# EAGLE board EX Analog (EAGLE 7.2.0)

Size 27 x 58 mm. Coordinates in mm from the lower left corner, seen from the top.
Outline: 0,0 27,0 27,58 0,58 0,0
Copper layers (1*16): Top 0.035mm / dielectric 1.5mm / Bottom 0.035mm
Design rules "default": minimum track width 10mil, minimum drill 24mil, track to track 8mil, track to pad 8mil, pad to pad 8mil, via to via 8mil, smd to smd 8mil, copper to edge 40mil, drill to drill 8mil, minimum pad ring 10mil, minimum via ring 8mil, stop-mask expansion 4mil, vias tented up to drill 0mil, thermal gap 10mil

## Footprints (pad centres in the part's own frame; a part is rotated, then mirrored left to right if it is on the bottom)
1X10-BIG = drill 1.016 pad 1.778 octagon: 1 -11.43,0; 2 -8.89,0; 3 -6.35,0; 4 -3.81,0; 5 -1.27,0; 6 1.27,0; 7 3.81,0; 8 6.35,0; 9 8.89,0; 10 11.43,0
CHIPLED_0805 = smd 1.2 x 1.2: A 0,-1.05; C 0,1.05
1X02 = drill 1.016 long: 1 -1.27,0; 2 1.27,0
R0805 = smd 1.1 x 1.4: 1 -1,0; 2 1,0
SO16 = smd 0.6 x 2.2: 1 -4.445,-2.6; 2 -3.175,-2.6; 3 -1.905,-2.6; 4 -0.635,-2.6; 5 0.635,-2.6; 6 1.905,-2.6; 7 3.175,-2.6; 8 4.445,-2.6; 9 4.445,2.6; 10 3.175,2.6; 11 1.905,2.6; 12 0.635,2.6; 13 -0.635,2.6; 14 -1.905,2.6; 15 -3.175,2.6; 16 -4.445,2.6
1X03 = drill 1.016: 1 -2.54,0; 2 0,0; 3 2.54,0

## Placement (x,y rotation side)
ANALOG_IN  PINHD-1X10  [1X10-BIG]  13.5,47 180 top
LEDPWR  [CHIPLED_0805]  2,9 0 top
NUSBIO_IN  PINHD-1X10  [1X10-BIG]  13.5,2 180 top
NUSBIO_OUT  PINHD-1X10  [1X10-BIG]  13.5,56.5 180 top
PULLDOWN_1K_A6  [1X02]  25.02,40.1 90 top
PULLDOWN_1K_A7  [1X02]  8,39 90 top
R_PULLDOWN_1K_1  [R0805]  23.5,33 0 top
R_PULLDOWN_1K_2  [R0805]  23.5,29 0 top
R_PWR_1K  [R0805]  25,9 90 top
U$1  MCP3008SL  [SO16]  6.5,31 180 top
VCC_A0_GND  [1X03]  24,20 270 top
VCC_A1_GND  [1X03]  6,20 270 top

## Library data of the parts
ANALOG_IN LEDPWR NUSBIO_IN NUSBIO_OUT R_PULLDOWN_1K_1 R_PULLDOWN_1K_2 R_PWR_1K VCC_A0_GND VCC_A1_GND = adafruit
PULLDOWN_1K_A6 PULLDOWN_1K_A7 = pinhead
U$1 = MCP3008

## Nets
GND: ANALOG_IN.10 NUSBIO_IN.10 NUSBIO_OUT.10 R_PULLDOWN_1K_1.2 R_PULLDOWN_1K_2.2 R_PWR_1K.1 U$1.9 U$1.14 VCC_A0_GND.3 VCC_A1_GND.3
N$1: NUSBIO_IN.1 NUSBIO_OUT.1 U$1.13
N$2: NUSBIO_IN.2 NUSBIO_OUT.2 U$1.11
N$3: NUSBIO_IN.3 NUSBIO_OUT.3 U$1.12
N$4: NUSBIO_IN.5 NUSBIO_OUT.5
N$5: NUSBIO_IN.4 NUSBIO_OUT.4 U$1.10
N$6: LEDPWR.C R_PWR_1K.2
N$7: NUSBIO_IN.6 NUSBIO_OUT.6
N$8: NUSBIO_IN.7 NUSBIO_OUT.7
N$9: NUSBIO_IN.8 NUSBIO_OUT.8
N$10: ANALOG_IN.1 U$1.1 VCC_A0_GND.2
N$11: ANALOG_IN.2 U$1.2 VCC_A1_GND.2
N$12: ANALOG_IN.3 U$1.3
N$13: ANALOG_IN.4 U$1.4
N$14: ANALOG_IN.6 U$1.6
N$15: ANALOG_IN.7 PULLDOWN_1K_A6.2 R_PULLDOWN_1K_1.1 U$1.7
N$16: ANALOG_IN.8 PULLDOWN_1K_A7.2 R_PULLDOWN_1K_2.1 U$1.8
N$17: ANALOG_IN.5 U$1.5
N$18: ANALOG_IN.9 LEDPWR.A NUSBIO_IN.9 NUSBIO_OUT.9 PULLDOWN_1K_A6.1 PULLDOWN_1K_A7.1 U$1.15 U$1.16 VCC_A0_GND.1 VCC_A1_GND.1

## Tracks (layer width: path | path; a pad name or v marks a point on that pad's centre or on a via)
GND  (9 unrouted)
N$1  (2 unrouted)
N$2  (2 unrouted)
N$3  (2 unrouted)
N$4  (1 unrouted)
N$5  (2 unrouted)
N$6  (1 unrouted)
N$7  (1 unrouted)
N$8  (1 unrouted)
N$9  (1 unrouted)
N$10  (2 unrouted)
N$11  (2 unrouted)
N$12  (1 unrouted)
N$13  (1 unrouted)
N$14  (1 unrouted)
N$15  (3 unrouted)
N$16  (3 unrouted)
N$17  (1 unrouted)
N$18  (9 unrouted)

## Text on the board
tNames: 3-NA | 0-CLK | 7 | 6 | 5 | 4 | GND | VCC | 2-MISO | 1-MOSI | GND | VCC | A7 | A6 | A5 | A4 | A3 | A2 | A1 | A0 | GND_A6 | GND_A7 | VCC | VCC | VCC | VCC | A1 | A0 | GND | GND | Analog Extension | SPI | MadeInTheUSB.net | + | GND | VCC | 7 | 6 | 5 | 4 | 3 | 2 | 1 | 0 | PCBv1